# EAGLE board 7seg_clock_ver3 (EAGLE 9.6.2)
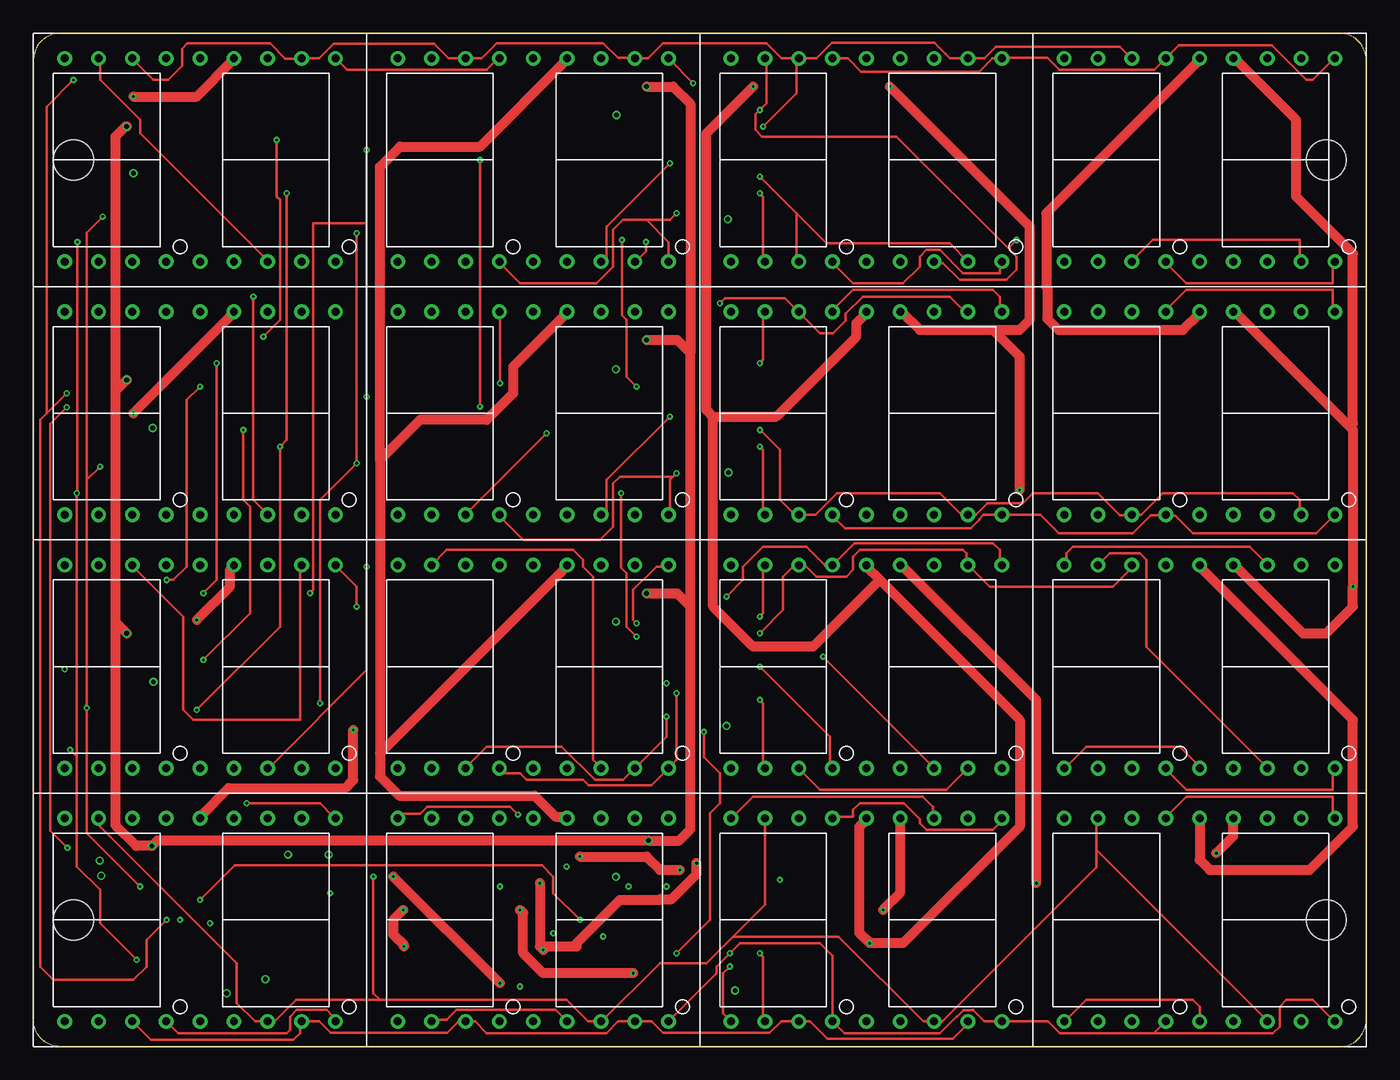
[diagram p0: board, top side]
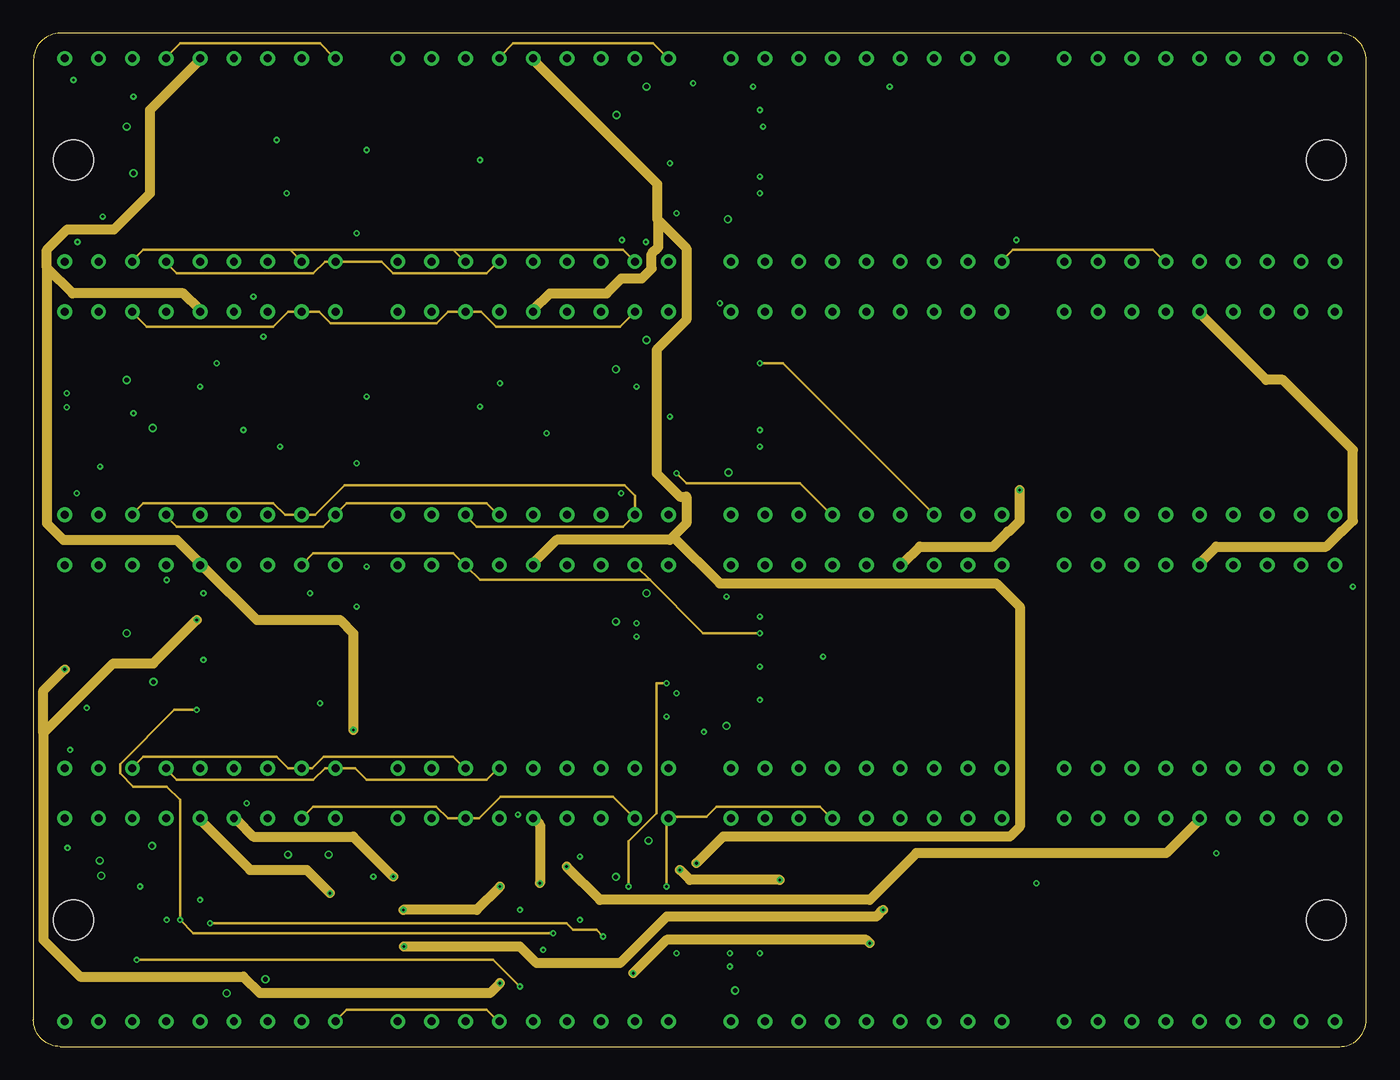
[diagram p1: board, inner layer Route2]
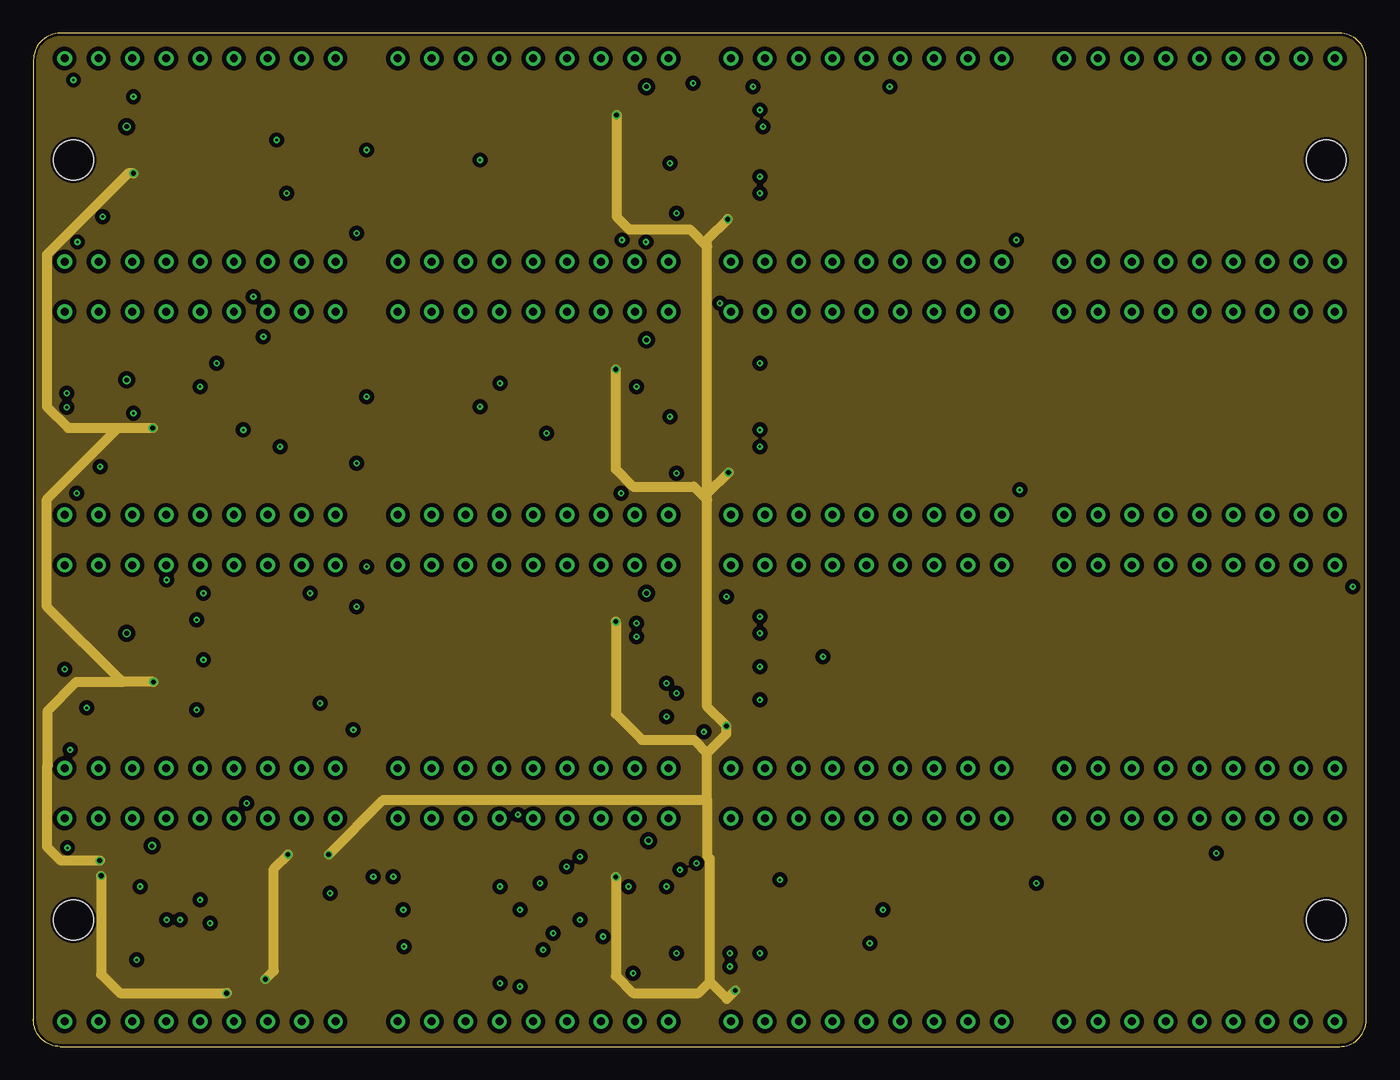
[diagram p2: board, inner layer Route15]
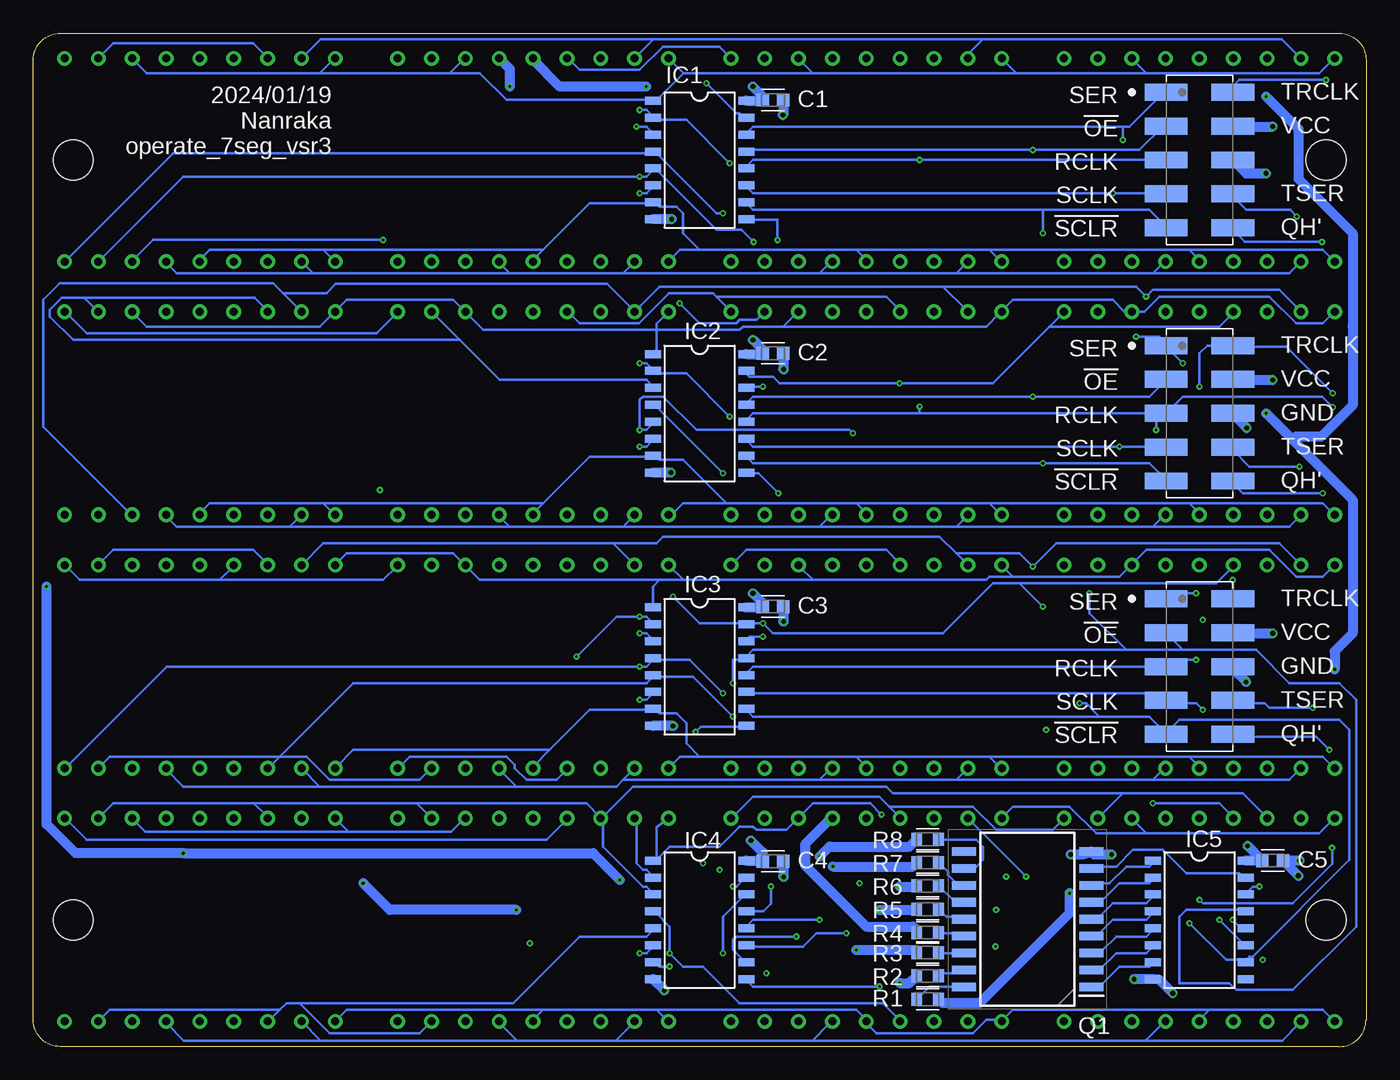
[diagram p3: board, bottom side, seen from below]

Size 100 x 76 mm. Coordinates in mm from the lower left corner, seen from the top.
Outline: 2,0 98,0 arc90 100,2 100,74 arc90 98,76 62.26,76 34,76 2,76 arc90 0,74 0,2 arc90 2,0
Copper layers (1+2*15+16): Top 0.035mm / dielectric 0.2mm / Route2 0.0175mm / dielectric 1.065mm / Route15 0.0175mm / dielectric 0.2mm / Bottom 0.035mm
Design rules "jlcpcb-4layers": minimum track width 3.5mil, minimum drill 0.2mm, track to track 5mil, track to pad 0.2mm, pad to pad 5mil, via to via 0.5mm, smd to smd 5mil, copper to edge 0.2mm, drill to drill 6mil, minimum pad ring 10mil, minimum via ring 0.13mm, stop-mask expansion 0.05mm, vias tented up to drill 16mil, thermal gap 10mil
Net classes: 0 default: width 0.203 mm, clearance 0.203 mm; 1 sup: width 0.762 mm, clearance 0.33 mm
Holes 3 mm at 3,66.5 3,9.5 97,9.5 97,66.5

## Footprints (pad centres in the part's own frame; a part is rotated, then mirrored left to right if it is on the bottom)
SL-3264 = drill 0.6: P$1 -10.16,-7.62; P$2 -7.62,-7.62; P$3 -5.08,-7.62; P$4 -2.54,-7.62; P$5 0,-7.62; P$6 2.54,-7.62; P$7 5.08,-7.62; P$8 7.62,-7.62; P$9 10.16,-7.62; P$10 10.16,7.62; P$11 7.62,7.62; P$12 5.08,7.62; P$13 2.54,7.62; P$14 0,7.62; P$15 -2.54,7.62; P$16 -5.08,7.62; P$17 -7.62,7.62; P$18 -10.16,7.62
CAPC1608X85 = smd 0.921 x 0.97: 1 -0.775,0; 2 0.775,0
SO16 = smd 0.6 x 1.2: 1 -4.445,-3.494; 2 -3.175,-3.494; 3 -1.905,-3.494; 4 -0.635,-3.494; 5 0.635,-3.494; 6 1.905,-3.494; 7 3.175,-3.494; 8 4.445,-3.494; 9 4.445,3.494; 10 3.175,3.494; 11 1.905,3.494; 12 0.635,3.494; 13 -0.635,3.494; 14 -1.905,3.494; 15 -3.175,3.494; 16 -4.445,3.494
TE_1241050-5 = smd 1.27 x 3.2: 1 -5.08,-2.5; 2 -5.08,2.5; 3 -2.54,-2.5; 4 -2.54,2.5; 5 0,-2.5; 6 0,2.5; 7 2.54,-2.5; 8 2.54,2.5; 9 5.08,-2.5; 10 5.08,2.5
SOIC127P1030X245-18N = smd 1.8 x 0.65: 1 -4.775,5.08; 2 -4.775,3.81; 3 -4.775,2.54; 4 -4.775,1.27; 5 -4.775,0; 6 -4.775,-1.27; 7 -4.775,-2.54; 8 -4.775,-3.81; 9 -4.775,-5.08; 10 4.775,-5.08; 11 4.775,-3.81; 12 4.775,-2.54; 13 4.775,-1.27; 14 4.775,0; 15 4.775,1.27; 16 4.775,2.54; 17 4.775,3.81; 18 4.775,5.08
RESC1608X60 = smd 0.799 x 0.974: 1 -0.815,0; 2 0.815,0

## Placement (x,y rotation side)
7SEG1  [SL-3264]  12.5,66.5 0 top
7SEG2  [SL-3264]  37.5,66.5 0 top
7SEG3  [SL-3264]  37.5,47.5 0 top
7SEG4  [SL-3264]  37.5,28.5 0 top
7SEG5  [SL-3264]  12.5,47.5 0 top
7SEG6  [SL-3264]  37.5,9.5 0 top
7SEG7  [SL-3264]  62.5,66.5 0 top
7SEG8  [SL-3264]  87.5,66.5 0 top
7SEG9  [SL-3264]  12.5,28.5 0 top
7SEG10  [SL-3264]  62.5,47.5 0 top
7SEG11  [SL-3264]  87.5,47.5 0 top
7SEG12  [SL-3264]  62.5,28.5 0 top
7SEG13  [SL-3264]  12.5,9.5 0 top
7SEG14  [SL-3264]  87.5,28.5 0 top
7SEG15  [SL-3264]  62.5,9.5 0 top
7SEG16  [SL-3264]  87.5,9.5 0 top
C1  [CAPC1608X85]  44.5,71 0 bottom
C2  [CAPC1608X85]  44.5,52 0 bottom
C3  [CAPC1608X85]  44.5,33 0 bottom
C4  [CAPC1608X85]  44.5,13.9 0 bottom
C5  [CAPC1608X85]  7,13.95 0 bottom
IC1  74HC595  [SO16]  50,66.5 270 bottom
IC2  74HC595  [SO16]  50,47.5 270 bottom
IC3  74HC595  [SO16]  50,28.5 270 bottom
IC4  74HC595  [SO16]  50,9.5 270 bottom
IC5  74HC595  [SO16]  12.5,9.5 270 bottom
J1  1241050-5  [TE_1241050-5]  12.5,66.5 270 bottom
J2  1241050-5  [TE_1241050-5]  12.5,47.5 270 bottom
J3  1241050-5  [TE_1241050-5]  12.5,28.5 270 bottom
Q1  TBD62083AFG,EL  [SOIC127P1030X245-18N]  25.4,9.55 180 bottom
R1  [RESC1608X60]  32.9,3.55 0 bottom
R2  [RESC1608X60]  32.9,5.3 180 bottom
R3  [RESC1608X60]  32.9,7.05 180 bottom
R4  [RESC1608X60]  32.9,8.55 180 bottom
R5  [RESC1608X60]  32.9,10.3 180 bottom
R6  [RESC1608X60]  32.9,12.05 180 bottom
R7  [RESC1608X60]  32.9,13.8 180 bottom
R8  [RESC1608X60]  32.9,15.55 180 bottom

## Library data of the parts
7SEG1-7SEG16 = SL3264; SL-3264: 三洋 7セグメントLED
C1-C5 = Capacitor; CATEGORY: Capacitor
IC1-IC5 = 74HC595N; AVAILABILITY: In Stock; DESCRIPTION: Shift Register Single 8-Bit Serial to Serial/Parallel 16-Pin SSOP T/R; MF: Nexperia; MP: 74HC595; PACKAGE: None; PRICE: None; PURCHASE-URL: https://pricing.snapeda.com/search/part/74HC595/?ref=eda
J1-J3 = PinHead_2.54_2line; AVAILABILITY: In Stock; COMMENT: 1241050-5; DESCRIPTION: Conn Unshrouded Header HDR 10 POS 2.54mm Solder ST SMD Automotive Reel; EU_ROHS_COMPLIANCE: Compliant; MF: TE Connectivity; MP: 1241050-5; PACKAGE: None; PRICE: None; PURCHASE-URL: https://pricing.snapeda.com/search/part/1241050-5/?ref=eda
Q1 = TBD62083AFG_EL; AVAILABILITY: In Stock; DESCRIPTION: Power Switch/Driver 1:1 N-Channel 500mA 18-SOP; MF: Toshiba Semiconductor; MP: TBD62083AFG,EL; PACKAGE: SOIC-18 Toshiba Semiconductor and Storage; PRICE: None; PURCHASE-URL: https://pricing.snapeda.com/search/part/TBD62083AFG,EL/?ref=eda
R1-R8 = Resistor; CATEGORY: Resistor; SUB-CATEGORY: Fixed

## Nets
0DATA0: 7SEG1.P$10 7SEG1.P$15 7SEG2.P$10 7SEG2.P$15 7SEG7.P$10 7SEG7.P$15 7SEG8.P$10 7SEG8.P$15 IC1.15
0DATA1: 7SEG1.P$12 7SEG1.P$18 7SEG2.P$12 7SEG2.P$18 7SEG7.P$12 7SEG7.P$18 7SEG8.P$12 7SEG8.P$18 IC1.1
0DATA2: 7SEG1.P$7 7SEG1.P$17 7SEG2.P$7 7SEG2.P$17 7SEG7.P$7 7SEG7.P$17 7SEG8.P$7 7SEG8.P$17 IC1.2
0DATA3: 7SEG1.P$11 7SEG1.P$16 7SEG2.P$11 7SEG2.P$16 7SEG7.P$11 7SEG7.P$16 7SEG8.P$11 7SEG8.P$16 IC1.3
0DATA4: 7SEG1.P$4 7SEG1.P$9 7SEG2.P$4 7SEG2.P$9 7SEG7.P$4 7SEG7.P$9 7SEG8.P$4 7SEG8.P$9 IC1.4
0DATA5: 7SEG1.P$3 7SEG1.P$8 7SEG2.P$3 7SEG2.P$8 7SEG7.P$3 7SEG7.P$8 7SEG8.P$3 7SEG8.P$8 IC1.5
0DATA6: 7SEG1.P$2 7SEG1.P$6 7SEG2.P$2 7SEG2.P$6 7SEG7.P$2 7SEG7.P$6 7SEG8.P$2 7SEG8.P$6 IC1.6
0DATA7: 7SEG1.P$1 7SEG1.P$5 7SEG2.P$1 7SEG2.P$5 7SEG7.P$1 7SEG7.P$5 7SEG8.P$1 7SEG8.P$5 IC1.7
1DATA0: 7SEG3.P$10 7SEG3.P$15 7SEG5.P$10 7SEG5.P$15 7SEG10.P$10 7SEG10.P$15 7SEG11.P$10 7SEG11.P$15 IC2.15
1DATA1: 7SEG3.P$12 7SEG3.P$18 7SEG5.P$12 7SEG5.P$18 7SEG10.P$12 7SEG10.P$18 7SEG11.P$12 7SEG11.P$18 IC2.1
1DATA2: 7SEG3.P$7 7SEG3.P$17 7SEG5.P$7 7SEG5.P$17 7SEG10.P$7 7SEG10.P$17 7SEG11.P$7 7SEG11.P$17 IC2.2
1DATA3: 7SEG3.P$11 7SEG3.P$16 7SEG5.P$11 7SEG5.P$16 7SEG10.P$11 7SEG10.P$16 7SEG11.P$11 7SEG11.P$16 IC2.3
1DATA4: 7SEG3.P$4 7SEG3.P$9 7SEG5.P$4 7SEG5.P$9 7SEG10.P$4 7SEG10.P$9 7SEG11.P$4 7SEG11.P$9 IC2.4
1DATA5: 7SEG3.P$3 7SEG3.P$8 7SEG5.P$3 7SEG5.P$8 7SEG10.P$3 7SEG10.P$8 7SEG11.P$3 7SEG11.P$8 IC2.5
1DATA6: 7SEG3.P$2 7SEG3.P$6 7SEG5.P$2 7SEG5.P$6 7SEG10.P$2 7SEG10.P$6 7SEG11.P$2 7SEG11.P$6 IC2.6
1DATA7: 7SEG3.P$1 7SEG3.P$5 7SEG5.P$1 7SEG5.P$5 7SEG10.P$1 7SEG10.P$5 7SEG11.P$1 7SEG11.P$5 IC2.7
2DATA0: 7SEG4.P$10 7SEG4.P$15 7SEG9.P$10 7SEG9.P$15 7SEG12.P$10 7SEG12.P$15 7SEG14.P$10 7SEG14.P$15 IC3.15
2DATA1: 7SEG4.P$12 7SEG4.P$18 7SEG9.P$12 7SEG9.P$18 7SEG12.P$12 7SEG12.P$18 7SEG14.P$12 7SEG14.P$18 IC3.1
2DATA2: 7SEG4.P$7 7SEG4.P$17 7SEG9.P$7 7SEG9.P$17 7SEG12.P$7 7SEG12.P$17 7SEG14.P$7 7SEG14.P$17 IC3.2
2DATA3: 7SEG4.P$11 7SEG4.P$16 7SEG9.P$11 7SEG9.P$16 7SEG12.P$11 7SEG12.P$16 7SEG14.P$11 7SEG14.P$16 IC3.3
2DATA4: 7SEG4.P$4 7SEG4.P$9 7SEG9.P$4 7SEG9.P$9 7SEG12.P$4 7SEG12.P$9 7SEG14.P$4 7SEG14.P$9 IC3.4
2DATA5: 7SEG4.P$3 7SEG4.P$8 7SEG9.P$3 7SEG9.P$8 7SEG12.P$3 7SEG12.P$8 7SEG14.P$3 7SEG14.P$8 IC3.5
2DATA6: 7SEG4.P$2 7SEG4.P$6 7SEG9.P$2 7SEG9.P$6 7SEG12.P$2 7SEG12.P$6 7SEG14.P$2 7SEG14.P$6 IC3.6
2DATA7: 7SEG4.P$1 7SEG4.P$5 7SEG9.P$1 7SEG9.P$5 7SEG12.P$1 7SEG12.P$5 7SEG14.P$1 7SEG14.P$5 IC3.7
3DATA0: 7SEG6.P$10 7SEG6.P$15 7SEG13.P$10 7SEG13.P$15 7SEG15.P$10 7SEG15.P$15 7SEG16.P$10 7SEG16.P$15 IC4.15
3DATA1: 7SEG6.P$12 7SEG6.P$18 7SEG13.P$12 7SEG13.P$18 7SEG15.P$12 7SEG15.P$18 7SEG16.P$12 7SEG16.P$18 IC4.1
3DATA2: 7SEG6.P$7 7SEG6.P$17 7SEG13.P$7 7SEG13.P$17 7SEG15.P$7 7SEG15.P$17 7SEG16.P$7 7SEG16.P$17 IC4.2
3DATA3: 7SEG6.P$11 7SEG6.P$16 7SEG13.P$11 7SEG13.P$16 7SEG15.P$11 7SEG15.P$16 7SEG16.P$11 7SEG16.P$16 IC4.3
3DATA4: 7SEG6.P$4 7SEG6.P$9 7SEG13.P$4 7SEG13.P$9 7SEG15.P$4 7SEG15.P$9 7SEG16.P$4 7SEG16.P$9 IC4.4
3DATA5: 7SEG6.P$3 7SEG6.P$8 7SEG13.P$3 7SEG13.P$8 7SEG15.P$3 7SEG15.P$8 7SEG16.P$3 7SEG16.P$8 IC4.5
3DATA6: 7SEG6.P$2 7SEG6.P$6 7SEG13.P$2 7SEG13.P$6 7SEG15.P$2 7SEG15.P$6 7SEG16.P$2 7SEG16.P$6 IC4.6
3DATA7: 7SEG6.P$1 7SEG6.P$5 7SEG13.P$1 7SEG13.P$5 7SEG15.P$1 7SEG15.P$5 7SEG16.P$1 7SEG16.P$5 IC4.7
COM0 [sup]: 7SEG1.P$14 7SEG5.P$14 7SEG9.P$14 7SEG13.P$14 R1.2
COM1 [sup]: 7SEG1.P$13 7SEG5.P$13 7SEG9.P$13 7SEG13.P$13 R2.2
COM2 [sup]: 7SEG2.P$14 7SEG3.P$14 7SEG4.P$14 7SEG6.P$14 R3.2
COM3 [sup]: 7SEG2.P$13 7SEG3.P$13 7SEG4.P$13 7SEG6.P$13 R4.2
COM4 [sup]: 7SEG7.P$14 7SEG10.P$14 7SEG12.P$14 7SEG15.P$14 R5.2
COM5 [sup]: 7SEG7.P$13 7SEG10.P$13 7SEG12.P$13 7SEG15.P$13 R6.2
COM6 [sup]: 7SEG8.P$14 7SEG11.P$14 7SEG14.P$14 7SEG16.P$14 R7.2
COM7 [sup]: 7SEG8.P$13 7SEG11.P$13 7SEG14.P$13 7SEG16.P$13 R8.2
CONF0: IC1.14 J1.1 J2.1 J3.1
CONF1: IC1.11 IC2.11 IC3.11 IC4.11 IC5.11 J1.7 J2.7 J3.7
CONF2: IC1.10 IC2.10 IC3.10 IC4.10 IC5.10 J1.9 J2.9 J3.9
CONF3: IC1.12 IC2.12 IC3.12 IC4.12 J1.5 J2.5 J3.5
CONF4: IC1.13 IC2.13 IC3.13 IC4.13 IC5.13 J1.3 J2.3 J3.3
CONF5: IC4.9 J1.10 J2.10 J3.10
CONF6: IC5.14 J1.8 J2.8 J3.8
CONF7: IC5.12 J1.2 J2.2 J3.2
GND [sup]: C1.2 C2.2 C3.2 C4.2 C5.2 IC1.8 IC2.8 IC3.8 IC4.8 IC5.8 J1.6 J2.6 J3.6 Q1.9
N$1: IC1.9 IC2.14
N$2: Q1.18 R1.1
N$3: Q1.17 R2.1
N$4: IC3.9 IC4.14
N$5: Q1.16 R3.1
N$6: IC5.7 Q1.1
N$7: IC5.6 Q1.2
N$8: IC5.5 Q1.3
N$9: IC5.4 Q1.4
N$10: Q1.15 R4.1
N$11: Q1.14 R5.1
N$12: IC5.3 Q1.5
N$13: IC5.2 Q1.6
N$14: IC5.1 Q1.7
N$15: IC5.15 Q1.8
N$16: Q1.13 R6.1
N$17: Q1.12 R7.1
N$18: Q1.11 R8.1
N$19: IC2.9 IC3.14
VCC [sup]: C1.1 C2.1 C3.1 C4.1 C5.1 IC1.16 IC2.16 IC3.16 IC4.16 IC5.16 J1.4 J2.4 J3.4

## Tracks (layer width: path | path; a pad name or v marks a point on that pad's centre or on a via)
0DATA0  (via drill 0.2)
  Top 0.203: 7SEG2.P$15 34.75,74 34,73.25 23.53,73.25 7SEG1.P$10 | v49.5,72.25 47.75,74 7SEG2.P$10 | 7SEG8.P$10 97.5,74 96,72.5 95.5,72.5 92.9,75.1 91.9,75.1 91.89,75.11 85.95,75.11 7SEG8.P$15 84.1,73.26 76.98,73.26 76.09,74.15 72.69,74.15 7SEG7.P$10 71.94,74.12 70.96,73.13 62.09,73.13 61.11,74.12 7SEG7.P$15
  Route2 0.203: 7SEG1.P$15 10,74.25 11,75.25 21.5,75.25 22.5,74.25 7SEG1.P$10 | 7SEG2.P$15 35,74.25 36,75.25 46.5,75.25 47.5,74.25 7SEG2.P$10
  Bottom 0.203: v49.5,72.25 47.25,70 47,70 46.75,69.75 IC1.15 | 7SEG7.P$15 59.75,74 59,73.25 54.5,73.25 52.75,75 48.5,75 47.75,74.25 7SEG2.P$10
0DATA1
  Bottom 0.203: 16.5,73 3.5,73 2.5,74 7SEG1.P$18 | 16.5,73 17.5,74 7SEG1.P$12 | 26.25,73 27.25,74 7SEG2.P$18 | 16.5,73 26.25,73 | 68.75,73 67.75,74 7SEG7.P$12 | 78.5,73 68.75,73 | 78.5,73 91.5,73 92.5,74 7SEG8.P$12 | 78.5,73 77.5,74 7SEG8.P$18 | 41.5,73 42.5,74 7SEG2.P$12 | 26.25,73 41.5,73 | 7SEG7.P$18 51.22,73 | 51.22,73 41.5,73 | 51.22,73 53.27,70.94 IC1.1 53.5,71 64.5,71 66.5,73 68.75,73
0DATA2  (via drill 0.2)
  Top 0.203: 7SEG1.P$7 17.5,59 8,68.5 8,69.5 5,72.5 5,74 7SEG1.P$17 | 7SEG7.P$17 55,74 55,70.75 v54.5,70.25 54.16,69.91 54.16,68.76 54.67,68.25 64.75,68.25 73.25,59.75 | v47.75,66.25 43,61.5 43,59.25 42.75,59 7SEG2.P$7 | 73.25,59.75 73.75,59.25 73.75,58.25 73,57.5 69.5,57.5 68.25,58.75 67.75,58.75 7SEG7.P$7 | v73.75,60.5 73.25,60 73.25,59.75
  Bottom 0.203: 7SEG2.P$17 29.88,74.43 28.75,75.56 | 28.75,75.56 6.31,75.56 5,74.25 7SEG1.P$17 | v54.5,70.25 54,70.25 53.5,69.75 IC1.2 53.25,69.5 51,69.5 v47.75,66.25 | 7SEG8.P$17 78.45,75.55 53.45,75.55 | v73.75,60.5 91,60.5 92.5,59 7SEG8.P$7 | 7SEG7.P$17 53.45,75.55 | 53.45,75.55 53.44,75.56 28.75,75.56
0DATA3  (via drill 0.2)
  Top 0.203: 7SEG1.P$16 7.5,74 9,72.5 10.1,72.5 11.15,73.55 11.15,74.85 11.55,75.25 17.75,75.25 18.9,74.1 20.1,74.1 7SEG1.P$11 21.45,74.12 22.52,75.2 30.05,75.2 31.13,74.12 7SEG2.P$16 33.62,74.12 34.75,75.25 42.75,75.25 43.85,74.15 45.09,74.15 7SEG2.P$11 46.12,74.12 47.25,75.25 55,75.25 56.13,74.12 7SEG7.P$16 | v54.75,69 57.25,71.5 57.25,74 7SEG7.P$16 | 7SEG8.P$16 82.25,74.25 81.52,74.98 72.23,74.98 71.37,74.12 7SEG7.P$11 68.78,74.12 68.44,74.46 68.44,74.48 67.61,75.31 59.93,75.31 58.74,74.12 7SEG7.P$16
  Bottom 0.203: v54.75,69 54,69 53.5,68.5 IC1.3 | 7SEG8.P$11 95,74.25 94,75.25 83.5,75.25 82.5,74.25 7SEG8.P$16
0DATA4  (via drill 0.2)
  Top 0.203: 7SEG7.P$4 60,58.75 61.5,57.25 65.25,57.25 66.5,58.5 66.5,59.25 67,59.75 68,59.75 69.75,58 72.5,58 72.5,58.75 7SEG7.P$9 | 7SEG8.P$4 85,58.75 86.5,57.25 97.5,57.25 97.5,58.75 7SEG8.P$9 | v48.25,62.5 47.75,62 46,62 | 7SEG2.P$4 35,58.75 36.5,57.25 42.25,57.25 43.5,58.5 43.5,61.25 44.25,62 46,62 | 46,62 47.66,60.34 7SEG2.P$9
  Route2 0.203: 7SEG7.P$9 72.75,59 73.5,59.75 84,59.75 84.75,59 7SEG8.P$4 | 7SEG1.P$4 10,58.75 10.75,58 21,58 21.88,58.88 7SEG1.P$9 26.12,58.88 26.98,58.02 33.98,58.02 34,58 34.75,58.75 7SEG2.P$4
  Bottom 0.203: v48.25,62.5 48.75,62.5 53.25,67 IC1.4 53.5,67 89.5,67 97.5,59 7SEG8.P$9
0DATA5  (via drill 0.2)
  Top 0.203: 7SEG8.P$3 82.5,59 84,60.5 95,60.5 95,59 7SEG8.P$8 | v54.5,65.25 57.25,62.5 | 57.25,62.5 57.25,59 7SEG7.P$3 | 7SEG7.P$8 68.75,60.25 59.5,60.25 57.25,62.5 | v45.95,60.35 45.95,59.65 7SEG2.P$8
  Route2 0.203: 19.25,59.75 8.25,59.75 7.5,59 7SEG1.P$3 | 7SEG1.P$8 19.25,59.75 | 31.5,59.75 32.25,59 7SEG2.P$3 | 19.25,59.75 31.5,59.75 | 7SEG2.P$8 44.25,59.75 31.5,59.75
  Bottom 0.203: 7SEG8.P$8 88.75,65.25 v54.5,65.25 54,65.25 53.5,65.75 IC1.5 53.25,65.75 48.75,61.25 46.85,61.25 v45.95,60.35
0DATA6  (via drill 0.2)
  Top 0.203: v54.5,64 54.75,63.75 54.75,59 7SEG7.P$2
  Bottom 0.203: 16,58 5.75,58 5,58.75 7SEG1.P$2 | 30.75,58 30,58.75 7SEG2.P$2 | 41,58 30.75,58 | 16,58 15.25,58.75 7SEG1.P$6 | 30.75,58 16,58 | 79,58 89.25,58 90,58.75 7SEG8.P$6 | v54.5,64 54,64 53.5,64.5 IC1.6 | 64.25,58 65,58.75 7SEG7.P$6 | 55.75,58 64.25,58 | 55.75,58 55,58.75 7SEG7.P$2 | 79,58 7SEG8.P$2 | 64.25,58 79,58 | 41,58 40.25,58.75 7SEG2.P$6 | 55.75,58 41,58
0DATA7
  Bottom 0.203: 13.25,59.75 3.25,59.75 2.5,59 7SEG1.P$1 | 28.25,59.75 27.5,59 7SEG2.P$1 | 38.25,59.75 28.25,59.75 | 13.25,59.75 12.5,59 7SEG1.P$5 | 28.25,59.75 13.25,59.75 | 78.25,59.75 77.5,59 7SEG8.P$1 | 78.25,59.75 86.75,59.75 87.5,59 7SEG8.P$5 | 61.75,59.75 58.25,63.25 53.5,63.25 IC1.7 53.25,63.25 53,63 51.75,63 51.25,62.5 51.25,61 50,59.75 | 61.75,59.75 62.5,59 7SEG7.P$5 | 38.25,59.75 37.5,59 7SEG2.P$5 | 50,59.75 51.47,59.75 7SEG7.P$1 | 50,59.75 38.25,59.75 | 61.75,59.75 78.25,59.75
1DATA0  (via drill 0.2)
  Top 0.203: 7SEG11.P$15 85,55.25 86.5,56.75 97.5,56.75 97.5,55.25 7SEG11.P$10 | 7SEG10.P$15 60,55.25 61.5,56.75 72,56.75 72.5,56.25 72.5,55.25 7SEG10.P$10 | v35,49.75 35,55 7SEG3.P$15
  Bottom 0.203: 23.75,54 22.75,55 7SEG5.P$10 | 23.75,54 28,49.75 v35,49.75 44,49.75 44.5,50.25 46.25,50.25 46.5,50.5 IC2.15 | 23.75,54 11,54 10,55 7SEG5.P$15 | 7SEG3.P$15 35,55.25 36,56.25 48.75,56.25 | 48.75,56.25 49,56.5 52.28,56.5 54.53,54.25 59,54.25 59.75,55 7SEG10.P$15 | 48.75,56.25 47.75,55.25 7SEG3.P$10 | 7SEG11.P$10 97.5,55 96,53.5 74.25,53.5 72.75,55 7SEG10.P$10
1DATA1
  Bottom 0.203: 7SEG5.P$18 2.5,55 3.25,54.25 5.25,54.25 7.25,56.25 15.5,56.25 16.65,55.1 17.56,55.1 7SEG5.P$12 18.12,55.12 19,56 26.5,56 27.25,55.25 7SEG3.P$18 27.5,55 28.5,54 43.75,54 | 53.25,53.75 53.25,52 IC2.1 | 43.75,54 42.75,55 7SEG3.P$12 | 43.75,54 46.75,54 47,53.75 53.25,53.75 | 7SEG11.P$12 92.5,55 91.5,54 78.5,54 77.5,55 7SEG11.P$18 77.25,55.25 76.5,56 68.5,56 67.75,55.25 7SEG10.P$12 67.5,55 66.25,53.75 53.25,53.75 | 7SEG10.P$18 53.25,54.21 53.25,53.75
1DATA2  (via drill 0.2)
  Top 0.203: v16.5,56.25 16.5,41 17.5,40 7SEG5.P$7 | v54.5,51.25 54.75,51.5 54.75,55 7SEG10.P$17 | v47.75,47.25 43,42.5 43,40.25 42.75,40 7SEG3.P$7
  Route2 0.203: v54.5,51.25 56.25,51.25 67.5,40 7SEG10.P$7
  Bottom 0.203: 7SEG5.P$17 5,55.25 6.5,56.75 16,56.75 v16.5,56.25 17.25,57 31.75,57 | v54.5,51.25 54,51.25 53.5,50.75 IC2.2 53.25,50.5 51,50.5 v47.75,47.25 | 81.25,56.5 80,55.25 7SEG11.P$17 | 7SEG11.P$7 92.75,40 99.25,46.5 99.25,56 98,57.25 82,57.25 81.25,56.5 | 31.75,57 30,55.25 7SEG3.P$17 | 31.75,57 53,57 7SEG10.P$17 55,55.25 56.95,57.2 77.3,57.2 78,56.5 81.25,56.5
1DATA3  (via drill 0.2)
  Top 0.203: 7SEG10.P$11 70,55 68.75,56.25 62.24,56.25 60.94,54.95 60.94,54.44 60,53.5 59,53.5 57.5,55 7SEG10.P$16 57.25,55.25 56.38,56.12 51.88,56.12 v51.5,55.75
  Route2 0.203: 7SEG5.P$16 7.5,55 8.5,54 18,54 19.1,55.1 20.1,55.1 7SEG5.P$11 21.45,55.12 22.3,54.26 22.99,54.26 23,54.25 30,54.25 30.01,54.26 30.24,54.26 31.09,55.12 7SEG3.P$16 33.58,55.12 34.7,54 44,54 7SEG3.P$11
  Bottom 0.203: 96.05,56.15 83.4,56.15 82.5,55.25 7SEG11.P$16 | 7SEG10.P$11 68,53 | 68,53 65,50 54,50 53.5,49.5 IC2.3 | 7SEG11.P$11 96.1,56.1 96.05,56.15 | 96.05,56.15 97.85,56.15 98.75,55.25 98.75,54.75 97,53 68,53 | v51.5,55.75 50,54.25 47.25,54.25 47,54.5 45.75,54.5 45.25,55 7SEG3.P$11
1DATA4  (via drill 0.2)
  Top 0.203: 7SEG10.P$4 60,39.75 60.88,38.88 70.33,38.88 70.98,39.52 70.98,39.56 71.3,39.88 7SEG10.P$9 75.57,39.88 76.95,38.5 82.5,38.5 83.85,39.85 84.93,39.85 7SEG11.P$4 85.01,39.83 85.67,39.83 87,38.5 96.25,38.5 97.5,39.75 7SEG11.P$9 | 48,42.75 47.75,42.5 47.75,40 7SEG3.P$9 | 48,42.75 v48.25,43 | 48,42.75 44,42.75 43.5,42.25 43.5,39 42.5,38 36.75,38 35,39.75 7SEG3.P$4
  Route2 0.203: 7SEG5.P$4 10,39.75 10.75,39 21.75,39 22.5,39.75 7SEG5.P$9 22.75,40 23.5,40.75 34,40.75 34.75,40 7SEG3.P$4 | v48.25,43 49,42.25 57.5,42.25 59.75,40 7SEG10.P$4
  Bottom 0.203: v48.25,43 53.25,48 IC2.4
1DATA5  (via drill 0.2)
  Top 0.203: 7SEG11.P$8 95,40 95,41 94.5,41.5 84.75,41.5 83.13,39.88 7SEG11.P$3 82.39,39.85 81.5,39.85 79.85,41.5 75,41.5 74.25,40.75 71.59,40.75 70.72,39.88 7SEG10.P$8 69.62,39.88 68,41.5 60.3,41.5 58.68,39.88 7SEG10.P$3 57.12,39.88 56,41 56,44.75 v54.5,46.25 | v38.5,46 32.5,40 7SEG3.P$3
  Route2 0.203: 7SEG5.P$3 7.5,40 8.25,40.75 18,40.75 18.87,39.88 7SEG5.P$8 21.13,39.88 23.34,42.09 44.34,42.09 45.12,41.31 7SEG3.P$8 44.24,39 33.25,39 32.5,39.75 7SEG3.P$3
  Bottom 0.203: IC2.5 53.5,46.75 54,46.25 v54.5,46.25 54.5,48.5 54.25,48.75 52.75,48.75 50.25,46.25 38.75,46.25 v38.5,46
1DATA6  (via drill 0.2)
  Top 0.203: v54.5,45 54.75,44.75 54.75,40 7SEG10.P$2
  Bottom 0.203: 16,39 5.75,39 5,39.75 7SEG5.P$2 | 30.75,39 30,39.75 7SEG3.P$2 | 41,39 30.75,39 | 16,39 15.25,39.75 7SEG5.P$6 | 30.75,39 16,39 | 80.75,39 80,39.75 7SEG11.P$2 | 80.75,39 89.25,39 90,39.75 7SEG11.P$6 | v54.5,45 54,45 53.5,45.5 IC2.6 | 64.25,39 65,39.75 7SEG10.P$6 | 55.75,39 64.25,39 | 55.75,39 55,39.75 7SEG10.P$2 | 64.25,39 80.75,39 | 41,39 40.25,39.75 7SEG3.P$6 | 55.75,39 41,39
1DATA7
  Bottom 0.203: 13.25,40.75 3.25,40.75 2.5,40 7SEG5.P$1 | 28.25,40.75 27.5,40 7SEG3.P$1 | 13.25,40.75 12.5,40 7SEG5.P$5 | 28.25,40.75 13.25,40.75 | 78.25,40.75 77.5,40 7SEG11.P$1 | 78.25,40.75 86.75,40.75 87.5,40 7SEG11.P$5 | 61.75,40.75 58.25,44.25 53.5,44.25 IC2.7 53.25,44.25 53,44 51.25,44 48,40.75 | 61.75,40.75 62.5,40 7SEG10.P$5 | 61.75,40.75 78.25,40.75 | 38.25,40.75 37.5,40 7SEG3.P$5 | 48,40.75 51.25,40.75 52.12,39.88 7SEG10.P$1 | 48,40.75 38.25,40.75 | 28.25,40.75 38.25,40.75
2DATA0  (via drill 0.2)
  Top 0.203: 7SEG12.P$10 72.5,36.25 72.5,37.25 72,37.75 61.59,37.75 7SEG12.P$15 59.38,36.12 58,37.5 54.75,37.5 53.25,36 53.25,35 v52,33.75 | v45.25,31.75 45,32 45,34.25 46.75,36 47.5,36 7SEG4.P$10 | v24.25,33 24.25,34.5 22.75,36 7SEG9.P$10
  Bottom 0.203: 86,35 73.75,35 72.75,36 7SEG12.P$10 | 86,35 96.5,35 97.5,36 7SEG14.P$10 | 86,35 85,36 7SEG14.P$15 | 26,34.75 28,34.75 31.75,31 44.5,31 v45.25,31.75 46.5,31.75 IC3.15 46.75,31.75 50,31.75 v52,33.75 | 26,34.75 11.25,34.75 10,36 7SEG9.P$15 | 7SEG4.P$15 35,36.25 36,37.25 46.5,37.25 47.5,36.25 7SEG4.P$10 | v24.25,33 26,34.75
2DATA1
  Top 0.203: 7SEG14.P$12 92.5,36.25 91.25,37.5 78,37.5 77.5,37 77.5,36.25 7SEG14.P$18
  Bottom 0.203: 7SEG9.P$18 2.5,36 3.25,35.25 5.25,35.25 7.25,37.25 16.5,37.25 17.5,36.25 7SEG9.P$12 17.75,36 18.5,35.25 26.5,35.25 | 26.5,35.25 27.25,36 7SEG4.P$18 | 7SEG14.P$18 77.25,36.25 76.5,37 68.5,37 67.75,36.25 7SEG12.P$12 67.5,36 66.5,35 53,35 | 41.5,35 28.5,35 28.25,35.25 26.5,35.25 | 41.5,35 42.5,36 7SEG4.P$12 | 41.5,35 51.22,35 | 51.22,35 53,35 | 7SEG12.P$18 51.22,35 | 53,35 53.49,34.51 IC3.1
2DATA2  (via drill 0.2)
  Top 0.203: v25,36 25,28.25 17.75,21 7SEG9.P$7 | 7SEG4.P$7 42.5,21 42,21.5 42,35.25 41.25,36 41.25,36.5 40.5,37.25 31.01,37.25 7SEG4.P$17 | v54.5,32.25 54.75,32.5 54.75,36 7SEG12.P$17 | v59.25,29.25 67.5,21 7SEG12.P$7 | 7SEG14.P$7 92.5,21 83.5,30 83.5,36.5 83,37 80.76,37 7SEG14.P$17
  Bottom 0.203: 30.75,37 26,37 v25,36 23.25,37.75 6.5,37.75 5,36.25 7SEG9.P$17 | IC3.2 53.5,31.75 54,32.25 v54.5,32.25 56.25,32.25 v59.25,29.25 | 7SEG14.P$17 78.25,37.75 56.5,37.75 | 56.5,37.75 55,36.25 7SEG12.P$17 | 30.75,37 32,38.25 52.75,38.25 53.25,37.75 56.5,37.75 | 30.75,37 30,36.25 7SEG4.P$17
2DATA3  (via drill 0.2)
  Top 0.203: 7SEG9.P$16 7.5,36 11.25,32.25 11.25,25.25 12,24.5 20,24.5 20,36 7SEG9.P$11 | v54.5,31 56.25,32.75 56.25,35.25 57.15,36.15 57.39,36.15 7SEG12.P$16 57.88,36.12 58.75,35.25 61,35.25 61.5,35.75 61.5,36.75 62,37.25 69.75,37.25 70,37 70,36.25 7SEG12.P$11 70.25,36 71.75,34.5 81,34.5 82.42,35.92 7SEG14.P$16
  Route2 0.203: 7SEG9.P$11 21,37 31.5,37 32.25,36.25 7SEG4.P$16 32.5,36 33.5,35 46.25,35 | 46.25,35 50.25,31 v54.5,31 | 46.25,35 45.25,36 7SEG4.P$11
  Bottom 0.203: v54.5,31 54,31 53.5,30.5 IC3.3 | 7SEG14.P$11 95,36.25 94,37.25 83.5,37.25 82.5,36.25 7SEG14.P$16
2DATA4  (via drill 0.2)
  Top 0.203: 7SEG14.P$4 85,20.75 86.5,19.25 97.5,19.25 97.5,20.75 7SEG14.P$9 | v54.5,28.5 59.75,23.25 59.75,21 7SEG12.P$4 | v48.25,26.5 48.25,21.5 47.75,21 7SEG4.P$9 46.37,19.59 41.66,19.59 41.25,20 37,20 36.5,20.5 35.34,20.5 7SEG4.P$4
  Route2 0.203: 7SEG9.P$4 10,20.75 10.75,20 21,20 21.88,20.88 7SEG9.P$9 24.12,20.88 25,20 34,20 34.75,20.75 7SEG4.P$4
  Bottom 0.203: 7SEG12.P$9 72.5,21 71.75,21.75 64.5,21.75 63.88,21.12 63.88,20.88 63,20 60.75,20 60,20.75 7SEG12.P$4 | 7SEG14.P$9 97.5,21 90,28.5 v54.5,28.5 54,28.5 53.5,29 IC3.4 53.25,29 50.75,29 v48.25,26.5
2DATA5  (via drill 0.2)
  Top 0.203: 7SEG4.P$3 32.5,21 34,22.5 39.63,22.5 42.13,20 44.24,20 7SEG4.P$8 45.25,21 47.5,23.25 v47.5,24.75 | 7SEG12.P$3 57.5,20.75 59,19.25 68.5,19.25 70,20.75 7SEG12.P$8
  Route2 0.203: 7SEG9.P$3 7.5,21 8.25,21.75 18.25,21.75 19.12,20.88 7SEG9.P$8 20.89,20.88 21.75,21.74 31.49,21.74 31.5,21.75 32.25,21 7SEG4.P$3
  Bottom 0.203: 81.5,21.75 82.25,21 7SEG14.P$3 | 81.5,21.75 76,27.25 54,27.25 53.5,27.75 IC3.5 53.25,27.75 50.5,27.75 v47.5,24.75 | 7SEG14.P$8 94.25,21.75 81.5,21.75 | 7SEG12.P$8 71,20 77.75,20 79.5,21.75 81.5,21.75
2DATA6  (via drill 0.2)
  Top 0.203: v54.5,26 54.75,25.75 54.75,21 7SEG12.P$2
  Bottom 0.203: 16,20 5.75,20 5,20.75 7SEG9.P$2 | 30.75,20 30,20.75 7SEG4.P$2 | 41,20 30.75,20 | 16,20 15.25,20.75 7SEG9.P$6 | 30.75,20 16,20 | 78.5,19.5 88.75,19.5 90,20.75 7SEG14.P$6 | v54.5,26 54,26 53.5,26.5 IC3.6 | 63.75,19.5 65,20.75 7SEG12.P$6 | 63.75,19.5 56.25,19.5 55.75,20 | 55.75,20 55,20.75 7SEG12.P$2 | 78.5,19.5 7SEG14.P$2 | 63.75,19.5 78.5,19.5 | 41,20 40.25,20.75 7SEG4.P$6 | 55.75,20 41,20
2DATA7
  Top 0.203: 7SEG14.P$5 87.5,21 86,22.5 79,22.5 77.5,21 7SEG14.P$1
  Bottom 0.203: 13.25,21.75 3.25,21.75 2.5,21 7SEG9.P$1 | 28.25,21.75 27.5,21 7SEG4.P$1 | 38.25,21.75 28.25,21.75 | 13.25,21.75 12.5,21 7SEG9.P$5 | 28.25,21.75 13.25,21.75 | 61.25,22.25 58.25,25.25 53.5,25.25 IC3.7 53.25,25.25 53,25 51.75,25 51,24.25 51,22.75 50,21.75 | 61.25,22.25 62.5,21 7SEG12.P$5 | 61.25,22.25 76,22.25 77.25,21 7SEG14.P$1 | 38.25,21.75 37.5,21 7SEG4.P$5 | 50,21.75 51.47,21.75 7SEG12.P$1 | 50,21.75 38.25,21.75
3DATA0  (via drill 0.2)
  Top 0.203: 7SEG15.P$15 60,17.25 61.5,17.25 61.5,17.75 62,18.25 65.3,18.25 66.5,17.05 66.5,16.75 67,16.25 72,16.25 72.66,16.91 7SEG15.P$10 | 7SEG16.P$15 85,17.25 86.5,18.75 97.5,18.75 97.5,17.25 7SEG16.P$10 | 7SEG13.P$10 22.5,17.25 21.5,18.25 v16,18.25
  Route2 0.203: v47.5,12 47.5,17 7SEG6.P$10 47.75,17.25 50.5,17.25 51.25,18 59,18 59.75,17.25 7SEG15.P$15
  Bottom 0.203: 7SEG15.P$15 60,17 61.5,15.5 96,15.5 97.5,17 7SEG16.P$10 | v16,18.25 11,18.25 10,17.25 7SEG13.P$15 | v47.5,12 47.25,12 46.75,12.5 IC4.15 | 35.75,18 36.5,18.75 46,18.75 47.5,17.25 7SEG6.P$10 | 35.75,18 35,17.25 7SEG6.P$15 | 35.75,18 29.5,18 27.75,16.25 23.5,16.25 22.75,17 7SEG13.P$10
3DATA1  (via drill 0.2)
  Top 0.203: 7SEG15.P$18 52.5,17.25 54,18.75 66.75,18.75 67.5,18 67.5,17.25 7SEG15.P$12 | v36.35,17.4 35.75,18 29.55,18 29.02,17.48 27.7,17.48 7SEG6.P$18
  Bottom 0.203: 16.5,16 3.5,16 2.5,17 7SEG13.P$18 | 16.5,16 17.5,17 7SEG13.P$12 | 16.5,16 20.25,16 22.25,18 26.5,18 27.25,17.25 7SEG6.P$18 | 53.25,14 53.25,16.44 7SEG15.P$18 | 53.25,14 IC4.1 | 76.35,16.1 68.65,16.1 67.75,17 7SEG15.P$12 | 76.35,16.1 77.25,17 7SEG16.P$18 | 76.35,16.1 91.6,16.1 92.5,17 7SEG16.P$12 | v36.35,17.4 37.2,18.25 41.5,18.25 42.5,17.25 7SEG6.P$12 42.75,17 43.5,16.25 45.75,16.25 46,16.5 47,16.5 48.5,15 52.25,15 53.25,14
3DATA2  (via drill 0.2)
  Top 0.203: 7SEG13.P$17 5,17 5,16.5 15.25,6.25 15.25,3.25 16.62,1.88 7SEG13.P$7 18.08,1.88 19.7,3.5 26,3.5 | 26,3.5 40,3.5 41.62,1.88 7SEG6.P$7 42.63,1.88 47,6.25 50.5,6.25 52.5,8.25 | v25.5,12.75 25.5,4 26,3.5 | 79.75,14.75 79.75,17 7SEG16.P$17 | 79.75,14.75 79.75,13.45 68.15,1.85 68.13,1.88 7SEG15.P$7 66.77,1.88 60.4,8.25 52.5,8.25 | 79.75,14.75 92.5,2 7SEG16.P$7 | 52.5,8.25 54.88,10.63 7SEG15.P$17
  Bottom 0.203: v25.5,12.75 29.75,17 7SEG6.P$17 | IC4.2 53.5,12.75 54,13.25 54.25,13.25 54.75,13.75 54.75,17 7SEG15.P$17
3DATA3
  Route2 0.203: 7SEG13.P$11 21,18 30.21,18 31.09,17.12 7SEG6.P$16 33.42,17.12 35.05,18.75 43.5,18.75 45,17.25 7SEG6.P$11
  Bottom 0.203: 7SEG13.P$16 7.5,17.25 9.25,19 18.24,19 | IC4.3 53.5,11.5 54,12 54.25,12 57.25,15 57.25,17 7SEG15.P$16 | 71.25,18.25 7SEG15.P$11 | 83.45,18.25 94,18.25 95,17.25 7SEG16.P$11 | 83.45,18.25 82.58,17.38 7SEG16.P$16 | 7SEG15.P$16 57.5,17.25 58.5,18.25 71.25,18.25 | 7SEG15.P$16 57.25,17.25 55,19.5 36,19.5 35.5,19 18.24,19 | 71.25,18.25 83.45,18.25 | 7SEG13.P$11 18.24,19
3DATA4  (via drill 0.2)
  Top 0.203: 84.08,1 77,1 76.1,1.9 72.68,1.9 7SEG15.P$9 71.37,1.88 70.5,2.75 70.49,2.74 69.76,2.74 69.28,2.25 69.25,2.25 68,1 60.84,1 7SEG15.P$4 59.95,6.8 59,7.75 53,7.75 v52.25,7 51.25,6 51.25,5.5 47.75,2 7SEG6.P$9 | 84.08,1 93,1 93.5,1.5 93.5,3 94,3.5 96,3.5 97.5,2 7SEG16.P$9 | 7SEG13.P$9 22.5,2 22.5,2.25 22,2.75 19.75,2.75 19.25,2.25 19.25,1.25 19,1 10.84,1 7SEG13.P$4 | 7SEG16.P$4 84.08,1
  Route2 0.203: 7SEG13.P$9 22.75,2 23.5,2.75 34,2.75 34.75,2 7SEG6.P$4
  Bottom 0.203: IC4.4 53.25,10 52.25,9 v52.25,7 51.25,6 49.75,6 47,3.25 36.25,3.25 35,2 7SEG6.P$4
3DATA5
  Top 0.203: 7SEG13.P$3 8.8,0.5 19.5,0.5 20,1 20,1.75 7SEG13.P$8 21.45,1.88 22.3,1.02 31.02,1.02 31.9,1.9 32.4,1.9 7SEG6.P$3 33.12,1.88 34,1 43,1 43.88,1.88 7SEG6.P$8 46.37,1.88 47.23,1.02 55.24,1.02 56.13,1.91 57.39,1.91 7SEG15.P$3 57.44,1.9 58.27,1.9 59.58,0.59 69,0.59 70.12,1.71 7SEG15.P$8
  Bottom 0.203: 80,3.25 81,3.25 81.5,2.75 | 80,3.25 64,3.25 59,8.25 54,8.25 53.5,8.75 IC4.5 | 81.5,2.75 82.25,2 7SEG16.P$3 | 7SEG15.P$8 71,1 77.75,1 80,3.25 | 7SEG16.P$8 94.25,2.75 81.5,2.75
3DATA6  (via drill 0.2)
  Top 0.203: 7SEG6.P$2 30,2 31,2 31.75,2.75 39.17,2.75 7SEG6.P$6 | v54.5,7 54.75,6.75 54.75,2 7SEG15.P$2
  Bottom 0.203: 7SEG13.P$2 5,1.75 6.3,0.45 16.45,0.45 16.5,0.5 | 16.5,0.5 16.55,0.45 41.55,0.45 | 16.5,0.5 15.25,1.75 7SEG13.P$6 | 7SEG16.P$6 90,1.75 88.7,0.45 78.45,0.45 | v54.5,7 54,7 53.5,7.5 IC4.6 | 63.7,0.45 65,1.75 7SEG15.P$6 | 56.3,0.45 63.7,0.45 | 56.3,0.45 55,1.75 7SEG15.P$2 | 78.45,0.45 7SEG16.P$2 | 78.45,0.45 63.7,0.45 | 41.55,0.45 40.25,1.75 7SEG6.P$6 | 56.3,0.45 41.55,0.45
3DATA7  (via drill 0.2)
  Top 0.203: 7SEG16.P$5 87.5,3 87,3.5 79,3.5 77.5,2 7SEG16.P$1 | v52.25,6 51.75,5.5 51.75,2.5 52.25,2 7SEG15.P$1
  Bottom 0.203: 11.75,2.75 3.25,2.75 2.5,2 7SEG13.P$1 | 11.75,2.75 12.5,2 7SEG13.P$5 | 11.75,2.75 26.5,2.75 27.25,2 7SEG6.P$1 27.5,2 28.5,2 29.5,1 36.75,1 37.5,1.75 7SEG6.P$5 37.5,2 38.25,2.75 53.25,2.75 | v52.25,6 53,6 53.25,6.25 IC4.7 | 61.75,2.75 62.5,2 7SEG15.P$5 | 53.25,2.75 61.75,2.75 | 53.25,2.75 52.5,2 7SEG15.P$1 | 61.75,2.75 76.5,2.75 77.25,2 7SEG16.P$1
COM0  (via drill 0.2)
  Top 0.762: 7SEG13.P$14 12.5,17.25 14.62,19.38 23.38,19.38 24,20 v24,23.75
  Route2 0.762: v22.25,11.5 20.5,13.25 16.25,13.25 12.5,17 7SEG13.P$14 | 1,58.43 1,39.25 2.25,38 10.75,38 12.5,36.25 7SEG9.P$14 12.75,36 16.75,32 23,32 24,31 v24,23.75 | 7SEG5.P$14 12.5,55.25 11.25,56.5 2.93,56.5 1,58.43 | 1,58.43 1,59.75 2.55,61.3 6.05,61.3 8.75,64 8.75,70.25 12.5,74 7SEG1.P$14
  Bottom 0.762: v22.25,11.5 22.25,10 29,3.25 31.75,3.25 32,3.5 R1.2
COM1  (via drill 0.2)
  Top 0.762: v27,12.75 v35,4.75 | v12.25,32 14.75,34.5 14.75,35.75 15,36 7SEG9.P$13 | v7.5,47.5 15,55 7SEG5.P$13 | v7.5,71.25 12.25,71.25 15,74 7SEG1.P$13
  Route2 0.762: v27,12.75 24,15.75 16.5,15.75 15.25,17 7SEG13.P$13 | v12.25,32 9,28.75 6,28.75 0.75,23.5 | 0.75,23.5 0.75,8 3.5,5.25 15.75,5.25 17,4 34.25,4 v35,4.75 | 0.75,23.5 0.75,26.7 v2.35,28.3
  Bottom 0.762: v35,4.75 34.25,4.75 33.75,5.25 R2.2 | 5.5,45.5 1,41 1,31 2.35,29.65 v2.35,28.3 | 5.5,45.5 v7.5,47.5 | 5.5,45.5 5.25,45.75 3.37,45.75 1.01,48.11 1.01,53.99 1,54 1,61 5.08,65.08 5.08,68.83 v7.5,71.25
COM2  (via drill 0.2)
  Top 0.762: v38,12.25 38,7.5 v38.25,7.25 38.5,7.5 40.75,7.5 40.75,7.75 44,11 47,11 47.06,11.06 47.89,11.06 49.75,12.92 v49.75,13.75
  Route2 0.762: 48,38.25 49,39.25 49,41.25 48.5,41.25 46.75,43 46.75,52.25 49,54.5 49,59.87 46.89,61.98 | 48,38.25 47.75,38 39.25,38 37.5,36.25 7SEG4.P$14 | 7SEG3.P$14 37.5,55.25 38.75,56.5 43,56.5 44.12,57.62 45.64,57.62 46.38,58.36 46.38,59.45 46.89,59.96 46.89,61.98 | 7SEG2.P$14 37.5,74 46.8,64.7 46.8,62.07 46.89,61.98 | v49.75,13.75 51.75,15.75 73.25,15.75 74,16.5 74,33 72.25,34.75 51.5,34.75 48,38.25 | 7SEG6.P$14 38,16.62 v38,12.25
  Bottom 0.762: v38.25,7.25 33.75,7.25 R3.2
COM3
  Top 0.762: 26,22 40,36 7SEG4.P$13 | 26,22 26,20.25 27.44,18.81 37.6,18.81 39.16,17.25 40,17.25 7SEG6.P$13 | 7SEG3.P$13 40,55 36,51 36,49 34,47 29,47 26,44 | 26,44 26,66 27.5,67.5 33.5,67.5 40,74 7SEG2.P$13 | 26,44 26,22
  Bottom 0.762: R4.2 33.75,8.75 34,9 37.5,9 42.09,13.59 42.09,15.16 40.25,17 7SEG6.P$13
COM4  (via drill 0.2)
  Top 0.762: v36.5,10.25 36.75,10 36.75,7 38.25,5.5 v45,5.5 | 7SEG15.P$14 62.5,17.02 61.95,16.47 61.95,8.55 v62.75,7.75 65.25,7.75 74,16.5 74,24.5 63.5,35 | 63.5,35 62.5,36 7SEG12.P$14 | 51,47.25 55.75,47.25 61.75,53.25 61.75,54.25 62.5,55 7SEG10.P$14 | 51,47.25 51,33 54,30 58.5,30 63.5,35 | v54,72 50.5,68.5 50.5,47.75 51,47.25
  Route2 0.762: v45,5.5 47.5,8 62.5,8 v62.75,7.75
  Bottom 0.762: v36.5,10.25 33.75,10.25 R5.2 | v54,72 60.5,72 62.5,74 7SEG7.P$14
COM5  (via drill 0.2)
  Top 0.762: 72,53.75 66.5,53.75 65.25,55 7SEG10.P$13 | 72,53.75 74,53.75 74.75,54.5 74.75,61.5 v64.25,72 | v63.75,10.25 65,11.5 65,17 7SEG15.P$13 | v75.25,12.25 75.25,26 65.25,36 7SEG12.P$13 | v74,41.75 74,51.75 72,53.75 | v27.75,10.25 27,9.5 27,8.4 27.8,7.6 v27.8,7.5
  Route2 0.762: v35,12 33.25,10.25 v27.75,10.25 | v27.8,7.5 36.5,7.5 37.75,6.25 44,6.25 47.5,9.75 63.25,9.75 v63.75,10.25 | 7SEG12.P$13 65.25,36.25 66.5,37.5 72,37.5 73.11,38.62 73.18,38.62 74,39.43 v74,41.75
  Bottom 0.762: v35,12 33.75,12 R6.2 | v75.25,12.25 73.25,10.25 v63.75,10.25 | 7SEG7.P$13 64.25,73.33 v64.25,72
COM6  (via drill 0.2)
  Top 0.762: 7SEG11.P$14 87.5,55 86.25,53.75 76.92,53.75 76.08,54.6 76.08,56.92 76,57 76,62.5 87.5,74 7SEG8.P$14 | 7SEG16.P$14 87.5,14 88.25,13.25 95.75,13.25 99,16.5 99,24.5 87.5,36 7SEG14.P$14
  Route2 0.762: v40,13.5 42.5,11 62.75,11 66.25,14.5 85,14.5 87.5,17 7SEG16.P$14 | 7SEG11.P$14 87.5,55 92.5,50 93.75,50 99,44.75 99,39.43 98.18,38.62 98.11,38.62 97,37.5 88.75,37.5 87.5,36.25 7SEG14.P$14
  Bottom 0.762: v40,13.5 34,13.5 33.75,13.75 R7.2
COM7  (via drill 0.2)
  Top 0.762: 98.75,46.5 90.25,55 7SEG11.P$13 | 98.75,46.5 99,46.25 v99,34.5 99,33 97,31 95.25,31 90.25,36 7SEG14.P$13 | 7SEG8.P$13 90.25,74 94.75,69.5 94.75,63.75 99,59.5 99,46.75 98.75,46.5 | v41,14.25 46,14.25 47,13.25 v48.5,13.25 | v88.75,14.5 90,15.75 90,17 7SEG16.P$13
  Route2 0.762: v48.5,13.25 49.25,12.5 v56,12.5
  Bottom 0.762: v41,14.25 40.25,15 34.25,15 33.75,15.5 R8.2 | v56,12.5 58,14.5 v88.75,14.5 96.83,14.5 99,16.67 v99,34.5
CONF0  (via drill 0.2)
  Top 0.203: v12.75,34 13.75,35 v13.75,51.25 | v17.25,53.25 18.5,54.5 18.5,63.5 18.25,63.75 v18.25,68
  Bottom 0.203: v12.75,34 14.75,34 15,33.75 J3.1 | v13.75,51.25 15,52.5 J2.1 15,52.75 15.5,53.25 v17.25,53.25 | 18.25,69 17.75,69 15.25,71.5 15,71.5 J1.1 | 18.25,69 46,69 46.5,68.5 IC1.14 | 18.25,69 v18.25,68
CONF1  (via drill 0.2)
  Top 0.203: v12.25,25.25 18.5,31.5 v18.5,45 19,45.5 v19,64
  Route2 0.203: v39,8.5 12,8.5 v11,9.5 11,18.5 10,19.5 7.5,19.5 6.5,20.5 6.5,21.18 10.57,25.25 v12.25,25.25
  Bottom 0.203: IC1.11 46.5,64.5 46,64 v19,64 15,64 J1.7 | IC2.11 46.5,45.5 46,45 v18.5,45 15,45 J2.7 | v11,9.5 9.25,7.75 IC5.11 | v12.25,25.25 12.75,25.75 15,25.75 J3.7 15,26 15.5,26.5 46.5,26.5 IC3.11 | v39,8.5 41.25,8.5 42.25,7.5 46.5,7.5 IC4.11
CONF2  (via drill 0.2)
  Top 0.203: v24.25,61 v24.25,43.75 21.5,41 v21.5,25.75
  Route2 0.203: v42.75,8.25 42.25,8.75 40.5,8.75 40,9.25 v13.25,9.25
  Bottom 0.203: IC2.10 46.5,44.25 46,43.75 v24.25,43.75 16.25,43.75 15,42.5 J2.9 | 24.25,62.75 16.25,62.75 15,61.5 J1.9 | 24.25,62.75 46,62.75 46.5,63.25 IC1.10 | 24.25,62.75 v24.25,61 | 15,23.5 14,24.5 2,24.5 1.25,23.75 1.25,14 8.5,6.75 8.75,6.75 9,6.5 IC5.10 9.25,6.5 10.5,6.5 v13.25,9.25 | IC4.10 46.75,6.5 47.5,7.25 47.5,8 47.25,8.25 v42.75,8.25 | 20,24.75 16.25,24.75 15,23.5 | 20,24.75 46,24.75 46.5,25.25 IC3.10 | 15,23.5 J3.9 | 20,24.75 21,25.75 v21.5,25.75
CONF3  (via drill 0.2)
  Top 0.203: v2.55,14.9 1.25,16.2 1.25,46.7 v2.5,47.95 | v41,9.5 39,11.5 39,12.75 38.15,13.6 15.1,13.6 v12.5,11 | v12.75,29 16.25,32.5 16.25,40.5 15.75,41 v15.75,46.25 | v33.5,48 v33.5,66.5
  Bottom 0.203: J1.5 v33.5,66.5 46,66.5 46.5,66 IC1.12 | IC3.12 46.5,28 46,28.5 J3.5 14.5,29 v12.75,29 | v2.5,47.95 3.3,48.75 13.75,48.75 J2.5 15.75,47.5 | v41,9.5 46,9.5 46.5,9 IC4.12 | v12.5,11 12.25,10.75 5.5,10.75 2.55,13.7 v2.55,14.9 | 15.75,47.5 33.5,47.5 | 33.5,47.5 46,47.5 46.5,47 IC2.12 | 15.75,47.5 v15.75,46.25 | 33.5,47.5 v33.5,48
CONF4  (via drill 0.2)
  Top 0.203: v25,67.25 25,61.75 | 25,61.75 v25,48.75 | 25,61.75 21,61.75 21,34.25 v20.75,34
  Route2 0.203: v47.5,27.25 46.75,27.25 46.75,17.5 44.65,15.4 v44.65,12
  Bottom 0.203: IC2.13 46.5,48.25 46,48.75 v25,48.75 16.25,48.75 15,50 J2.3 | IC1.13 46.5,67.25 v25,67.25 17,67.25 15.25,69 15,69 J1.3 | v47.5,27.25 47.5,29 46.75,29 IC3.13 46.5,29.25 46,29.75 18,29.75 | 13.75,29.75 8.25,29.75 5.75,27.25 2,27.25 0.75,26 0.75,9 5.5,4.25 9.75,4.25 10.25,4.75 14,4.75 14,9.75 13.5,10.25 9.25,10.25 IC5.13 | 13.75,29.75 15,31 J3.3 | 13.75,29.75 18,29.75 | v44.65,12 44.65,10.7 45.22,10.13 IC4.13 | v20.75,34 20.75,32.5 18,29.75
CONF5  (via drill 0.2)
  Top 0.203: v7.75,6.5 5,9.25 5,11.75 3.25,13.5 3.25,21.75 | v2.75,22.25 3.25,21.75 | 3.25,21.75 v3.25,41.5 3.3,41.55 v3.3,60.35
  Route2 0.203: v36.5,4.5 34.5,6.5 v7.75,6.5
  Bottom 0.203: v36.5,4.5 46,4.5 46.5,5 IC4.9 | v2.75,22.25 3.75,23.25 10,23.25 J3.10 | v3.25,41.5 9.25,41.5 10,42.25 J2.10 | v3.3,60.35 9.1,60.35 10,61.25 J1.10
CONF6  (via drill 0.2)
  Top 0.203: v8,12 4,16 v4,25.4 4,42.5 | 4,42.5 v5,43.5 | v5.2,62.25 4,61.05 4,42.5
  Bottom 0.203: v8,12 8.5,12 9,11.5 IC5.14 | v4,25.4 7.25,25.4 7.6,25.75 10,25.75 J3.8 | v5,43.5 8.75,43.5 10,44.75 J2.8 | v5.2,62.25 5.7,62.75 9,62.75 10,63.75 J1.8
CONF7  (via drill 0.2)
  Top 0.203: v10,9.5 8.5,8 8.5,6 7.5,5 1.5,5 0.5,6 0.5,47 1,47.5 | v2.5,49 1,47.5 | v12.5,49.5 11.5,48.5 11.5,36 10.5,35 v10,35 | v3,72.5 1,70.5 1,47.5
  Bottom 0.203: v10,9.5 9.5,9 IC5.12 | v2.5,49 6,52.5 10,52.5 J2.2 11.92,52.58 12.5,52 v12.5,49.5 | v10,35 J3.2 | v3,72.5 9.5,72.5 10,72 J1.2
GND  (via drill 0.35)
  Route15 0.762: v52.65,4.2 52.02,3.58 50.75,4.85 | 50.55,41.45 50.55,60 | 50.55,18.5 50.55,22 | v14.5,4 6.5,4 5.08,5.42 v5.08,12.81 | v19.1,14.4 18.02,13.32 18.02,5.67 v17.4,5.05 | v7.5,65.5 7.1,65.5 1,59.4 1,48 2.6,46.4 6.35,46.4 | 50.55,18.5 26.25,18.5 v22.15,14.4 | v4.97,13.95 2.05,13.95 1,15 1,21 1.07,21.07 1.07,25.2 3.22,27.35 6.65,27.35 6.5,27.5 | v43.7,12.72 43.7,5.3 45,4 49.9,4 50.75,4.85 | v43.7,31.88 43.7,24.95 45.66,23 49.55,23 50.55,22 | v43.75,69.88 43.75,62.25 44.7,61.3 49.25,61.3 50.55,60 | 50.55,60 50.55,60.5 v52.1,62.05 | 50.55,41 49.55,42 45,42 43.7,43.3 v43.7,50.8 | 50.55,41 50.55,41.45 | v52.16,43.05 50.55,41.45 | 50.75,4.85 50.74,4.86 50.74,14.09 50.55,14.28 50.55,18.5 | 50.55,22 52,23.45 v52,24.05 50.55,25.5 50.55,41 | v9,27.35 6.72,27.35 6.57,27.5 6.5,27.5 | 6.5,27.5 1,33 1,41.05 6.35,46.4 | 6.35,46.4 v8.95,46.4
  Bottom 0.762: IC4.8 v52.65,4.21 v52.65,4.2 | v52,24.05 52.05,24.05 IC3.8 | v14.5,4 15.5,5 IC5.8 v17.4,5.05 | v19.1,14.4 20.4,14.4 Q1.9 21.29,14.4 v22.15,14.4 | v9,27.35 10,28.35 J3.6 | v8.95,46.4 10,47.45 J2.6 | J1.6 9,65.5 v7.5,65.5 | v4.97,13.95 C5.2 v5.08,12.81 | C4.2 43.73,12.75 v43.7,12.72 | C3.2 43.73,31.9 v43.7,31.88 | C1.2 43.73,69.9 v43.75,69.88 | v52.1,62.05 IC1.8 | v52.16,43.05 IC2.8 | C2.2 43.73,50.83 v43.7,50.8
  pour Route15: 0,76 0,0 100,0 100,76
N$1  (via drill 0.2)
  Top 0.203: v45.25,49.5 44.5,50.25 44.5,54.5 44.15,54.85 v44.15,60.5
  Bottom 0.203: v45.25,49.5 46.5,49.5 IC2.14 | v44.15,60.5 44.15,62 46.5,62 IC1.9
N$2
  Bottom 0.203: R1.1 33.5,3.75 32.75,4.5 30.25,4.5 Q1.18
N$3
  Bottom 0.203: R2.1 32,5.5 30.25,5.5 Q1.17
N$4  (via drill 0.2)
  Top 0.203: v48.25,7 50.75,9.5 50.75,17.5 51.5,18.25 51.5,20.5 50.3,21.7 v50.3,23.6
  Bottom 0.203: v48.25,7 48.25,9.75 46.75,11.25 IC4.14 | v50.3,23.6 49.9,24 46.75,24 IC3.9
N$5
  Bottom 0.203: R3.1 32,7 30.25,7 Q1.16
N$6
  Bottom 0.203: IC5.7 16,6.25 16.25,6 18.5,6 20,4.5 20.5,4.5 Q1.1
N$7
  Bottom 0.203: IC5.6 16,7.5 16.5,7 18.75,7 20,5.75 20.5,5.75 Q1.2
N$8
  Bottom 0.203: IC5.5 16,8.75 16.5,8.25 18.75,8.25 19.75,7.25 20.5,7.25 Q1.3
N$9
  Bottom 0.203: IC5.4 16,10 16.5,9.5 19,9.5 20,8.5 20.5,8.5 Q1.4
N$10
  Bottom 0.203: R4.1 32,8.5 30.25,8.5 Q1.15
N$11
  Bottom 0.203: R5.1 32,10.25 31.5,9.75 30.25,9.75 Q1.14
N$12
  Bottom 0.203: IC5.3 16,11.25 16.5,10.75 19,10.75 20,9.75 20.5,9.75 Q1.5
N$13
  Bottom 0.203: IC5.2 16,12.5 16.25,12.25 18.5,12.25 19.75,11 20.5,11 Q1.6
N$14
  Bottom 0.203: IC5.1 16,13.75 16.25,13.5 18,13.5 19.25,12.25 20.5,12.25 Q1.7
N$15
  Bottom 0.203: IC5.15 9.25,12.75 9.5,13 13.5,13 15.25,14.75 17.5,14.75 18.75,13.5 20.5,13.5 Q1.8
N$16
  Bottom 0.203: R6.1 32,12 31,11 30.25,11 Q1.13
N$17
  Bottom 0.203: Q1.12 30.25,12.25 30.75,12.25 31.38,12.88 31.38,13.1 R7.1
N$18
  Bottom 0.203: R8.1 32,15.5 29.25,15.5 28.75,15 28.75,14 29.25,13.5 30,13.5 Q1.11
N$19  (via drill 0.2)
  Top 0.203: v45.25,30.75 44.5,31.5 44.5,35.5 44.1,35.9 v44.1,41.5
  Bottom 0.203: v45.25,30.75 46.25,30.75 46.5,30.5 IC3.14 | v44.1,41.5 45.6,43 46.5,43 IC2.9
VCC  (via drill 0.35)
  Top 0.762: 49.3,33 49.3,52 | 49.3,33 49.3,16.3 48.45,15.45 v46.15,15.45 9.3,15.45 v8.9,15.05 7.7,15.05 6.14,16.61 6.14,31.86 | v46,34 48.3,34 49.3,33 | v46,53 48.3,53 49.3,52 | v46,72 48,72 49.3,70.7 49.3,52 | v7,69 6.9,69 6.14,68.25 6.14,49.15 | v7,50 6.14,49.15 | v7,31 6.14,31.86 | 6.14,49.15 6.14,31.86
  Bottom 0.762: IC5.16 C5.1 8.88,15.05 v8.9,15.05 | IC4.16 45.32,13.95 C4.1 45.27,14.57 v46.15,15.45 | IC3.16 45.33,32.95 C3.1 45.27,33.27 v46,34 | IC2.16 45.33,51.95 C2.1 45.27,52.27 v46,53 | IC1.16 45.33,70.94 C1.1 45.27,71.28 v46,72 | J3.4 9.96,31 v7,31 | J2.4 9.96,50 v7,50 | J1.4 9.96,69 v7,69

## Text on the board
bNames: SER | 2024/01/19 / Nanraka / operate_7seg_vsr3 | TRCLK | !OE | VCC | RCLK | SCLK | TSER | !SCLR | QH' | SER | TRCLK | !OE | VCC | RCLK | GND | SCLK | TSER | !SCLR | QH' | SER | TRCLK | !OE | VCC | RCLK | GND | SCLK | TSER | !SCLR | QH'